# Altium PCB SteeringPCB.PcbDoc
Units mil, origin at the board's own origin, x right, y up, seen from the top; angles counter-clockwise.
Board outline 6000 x 4000 mil, 2 copper layers (Top Layer, Bottom Layer); 8 components, 3 nets, 39 pads, 0 vias.
Unrouted connection lines stored in the file: 8.
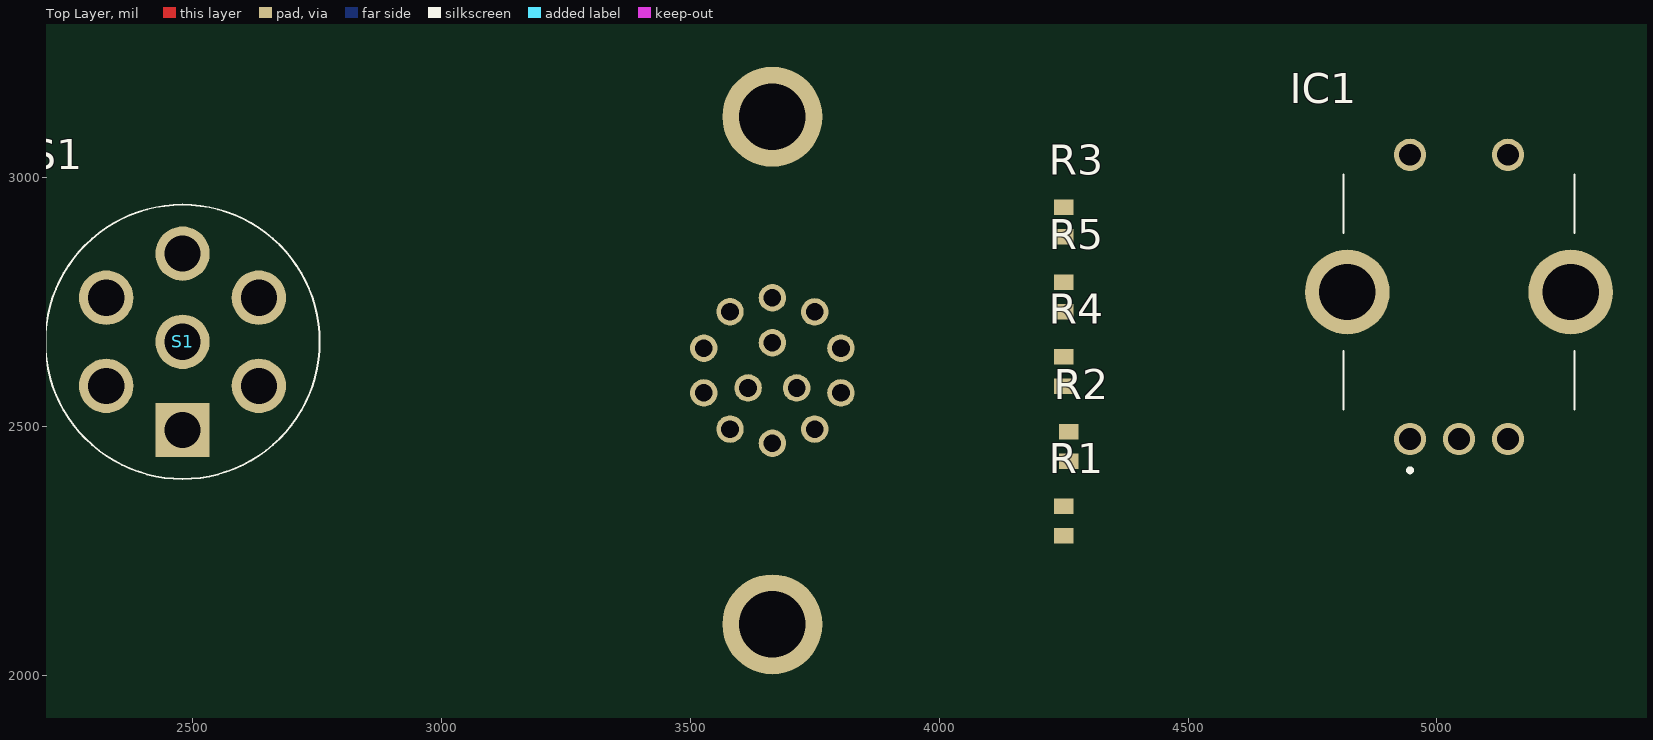
[diagram p0: Top Layer view]
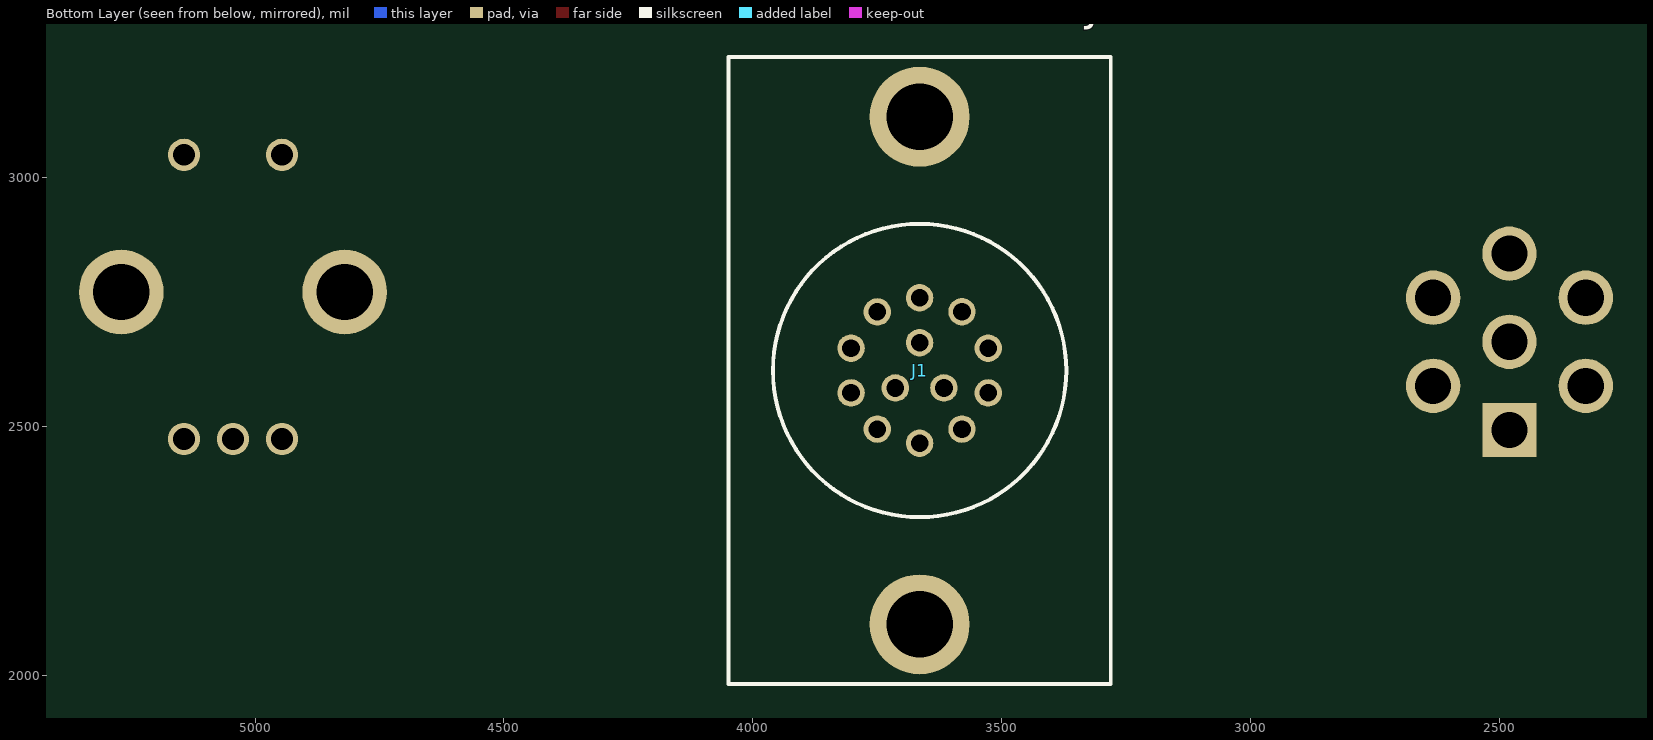
[diagram p1: Bottom Layer view, seen from below]

## Layer stack, top to bottom
Top Solder: solder mask 0.4, Solder Resist, Dk 3.5
Top Layer: signal copper 1.4
Dielectric 1: dielectric 12.6, FR-4, Dk 4.8
Bottom Layer: signal copper 1.4
Bottom Solder: solder mask 0.4, Solder Resist, Dk 3.5

## Board outline
1000,1000 7000,1000 7000,5000 1000,5000

## Design rules (kind name [scope] priority, off if disabled: settings)
Clearance [All] p1: gap=10 ignorepadtopadclearanceinfootprint=FALSE except(0: Arc-Hole Track-Hole SMDPad-Hole THPad-Hole Via-Hole Fill-Hole Poly-Hole Region-Hole Text-Hole)
PolygonConnect [All] p1: connectstyle=Relief reliefconductorwidth=10 reliefentries=4 polygonreliefangle="90 Angle" airgapwidth=10
RoomDefinition Sheet2 [InComponentClass('Sheet2')] p1: confinementstyle=ConfineIn formatcopy=TRUE lockcomponents=FALSE outline 7185,990 9495,990 9495,1855 7185,1855
RoutingVias [All] p1: holewidth=28 width=50 viastyle="Through Hole" minholewidth=28 minwidth=50 maxholewidth=28 maxwidth=50
SolderMaskExpansion [All] p1: expansion=4 istentingtop=FALSE
Width [All] p1: maxlimit=39.37 minlimit=10 preferedwidth=19.68 bottomlayer_maxwidth=10 bottomlayer_prefwidth=10 minimp=50.000000 maximp=50.000000 favimp=50.000000
30 further rules are at their usual default settings.

## Components (designator, comment, footprint, x,y, rotation, side; value= is the part's Value field where it differs from the comment)
IC1 "PEC11H-4220K-S0024" PEC11H4220KS0024 4945.98,2474.72 r0 top
J1 "8STA21035PN" 8STA21035PN 3664.96,2758.35 r180 bottom
R1 "RC0603FR-071K5L" RESC1608X55X25ML10T15 4250,2310 r270 top
R2 "RC0603FR-071K5L" RESC1608X55X25ML10T15 4260,2459.53 r270 top
R3 "RC0603FR-071K5L" RESC1608X55X25ML10T15 4250,2910.47 r270 top
R4 "RC0603FR-071K5L" RESC1608X55X25ML10T15 4250,2610.47 r270 top
R5 "RC0603FR-071K5L" RESC1608X55X25ML10T15 4250,2760 r270 top
S1 "MRY106-A" MRY106A 2480,2492.83 r0 top

## Footprints (in the part's own frame and the unit in brackets; to place one, negate y for a bottom-side part, rotate by r counter-clockwise, add the part's x,y. Pads: shape width x height; smd on the part's side, far side on the other; paste and mask are expansions set on the pad)
8STA21035PN [mm]
  round 1.4 hole 0.9: 1(0,0) 2(2.16,-0.71) 3(3.5,-2.57) 4(3.5,-4.85) 5(2.16,-6.7) 6(0,-7.42) 7(-2.16,-6.7) 8(-3.5,-4.85) 9(-3.5,-2.57) 10(-2.16,-0.72) 11(0,-2.29) 12(1.24,-4.6) 13(-1.24,-4.6)
  round 5.1 hole 3.4: MH1(0,9.24) MH2(0,-16.66)
  silkscreen extent -9.75,-19.71 9.75,12.29, body extent -9.75,-19.71 9.75,12.29, height 27.75
MRY106A [mm]
  rect 2.775x2.775 hole 1.85: 1(0,0)
  round 2.775 hole 1.85: 2(-3.897,2.25) 3(-3.897,6.75) 4(0,9) 5(3.897,6.75) 6(3.897,2.25) A1(0,4.5)
  silkscreen extent -7,-2.5 7,11.5, body extent -7,-2.48 7,11.48, height 42.6
PEC11H4220KS0024 [mm]
  round 1.65 hole 1.1: A1(0,0) B1(5,0) C1(2.5,0) S1(0,14.5) W1(5,14.5)
  round 4.32 hole 2.88: MH1(-3.2,7.5) MH2(8.2,7.5)
  silkscreen extent -3.4,-1.7 8.4,13.5, body extent -4.54,-0.45 9.54,14.95, height 26.6
RESC1608X55X25ML10T15 [mm] "Chip Resistor, 2-Leads, Body 1.60x0.80mm, IPC Low Density"
  rect 0.8x1 smd: 1(-0.75,0) 2(0.75,0)
  body extent -0.85,-0.45 0.85,0.45, height 0.55

## Part data
IC1: "Integrated Circuit", Manufacturer_Name=Bourns, Mouser Part Number=652-PEC11H4220KS0024, Arrow Part Number=PEC11H-4220K-S0024, Arrow Price/Stock=https://www.arrow.com/en/products/pec11h-4220k-s0024/bourns?region=nac, Datasheet Link=http://www.bourns.com/docs/Product-Datasheets/PEC11H.pdf, Height=26.5mm, Manufacturer_Part_Number=PEC11H-4220K-S0024, Mouser Price/Stock=https://www.mouser.co.uk/ProductDetail/Bourns/PEC11H-4220K-S0024?qs=7MVldsJ5UazL2X7%252BHN%252B7sQ%3D%3D
J1: "Connector", Manufacturer_Name="Sunbank / Souriau", Height=27.65mm, Manufacturer_Part_Number=8STA21035PN
R1 R2 R3 R4 R5: library part CMP-2100-03665-1, "Chip Resistor, 1.5 KOhm, +/- 1%, 0.1 W, -55 to 155 degC, 0603 (1608 Metric), RoHS, Tape and Reel", Case Code (Imperial)=0603, Case Code (Metric)=1608, Manufacturer=Yageo, Max Operating Temperature=155degC, Max Power Dissipation=100mW, Min Operating Temperature=-55degC, Package Description="2-Pin Surface Mount Device, Body 1.6 x 0.8 mm", Package Quantity=1, Resistance=1.5KOhm, Temperature Coefficient=100ppm/degreesC, Tolerance=1%, Voltage Rating=50V, Case/Package=0603, Composition=ThickFilm, Datasheet URL=http://www.yageo.com/NewPortal/yageodocoutput?fileName=/pdf/R-Chip/PYu-RC_Group_51_RoHS_L_5.pdf, Datasheet Version="Rev. 5, 10/2016", Depth=0.8mm, Height=0.022inch, Lead Free=LeadFree, Length=0.063inch, Manufacturer URL=http://www.yageo.com/, Military Standard=Not, Number of Pins=2, Number of Terminations=2, Package Reference=0603, Packaging=TapeandReel, Power Rating=100mW, REACH SVHC=NoSVHC, RoHSCompliant=true, Termination=SMD/SMT, Voltage Rating (DC)=50V, Width=0.031inch
S1: "Switch", Manufacturer_Name="NKK Switches", Mouser Part Number=633-MRY106A, Arrow Part Number=MRY106-A, Arrow Price/Stock=https://www.arrow.com/en/products/mry106-a/nkk-switches?region=nac, Datasheet Link=http://www.nkkswitches.com/pdf/MRpowerLevel.pdf, Height=42.5mm, Manufacturer_Part_Number=MRY106-A, Mouser Price/Stock=https://www.mouser.co.uk/ProductDetail/NKK-Switches/MRY106-A?qs=vtN2KNUHTpWsG2Pe3z28oQ%3D%3D

## Nets (pads, with @x,y where several pads share a name; then routed paths per layer and width w, separated by ;. In a path a pad name is that pad's centre, name@x,y a point inside that pad or via, vN(x,y) a via of type N, cw(c..) or ccw(c..) an arc to the next point about the centre after c; other vN are vias at no path point)
GND: J1.2 J1.3 J1.4 J1.5 J1.6 J1.7 J1.8
NetJ1_9: J1.9 R3.1
NetR1_2: R1.2 R2.1
pads on no net: IC1.A1 IC1.B1 IC1.C1 IC1.MH1 IC1.MH2 IC1.S1 IC1.W1 J1.1 J1.10 J1.11 J1.12 J1.13 J1.MH1 J1.MH2 R1.1 R2.2 R3.2 R4.1 R4.2 R5.1 R5.2 S1.1 S1.2 S1.3 S1.4 S1.5 S1.6 S1.A1